# EAGLE board Thetis_RevF6_PCB (EAGLE 9.7.0)
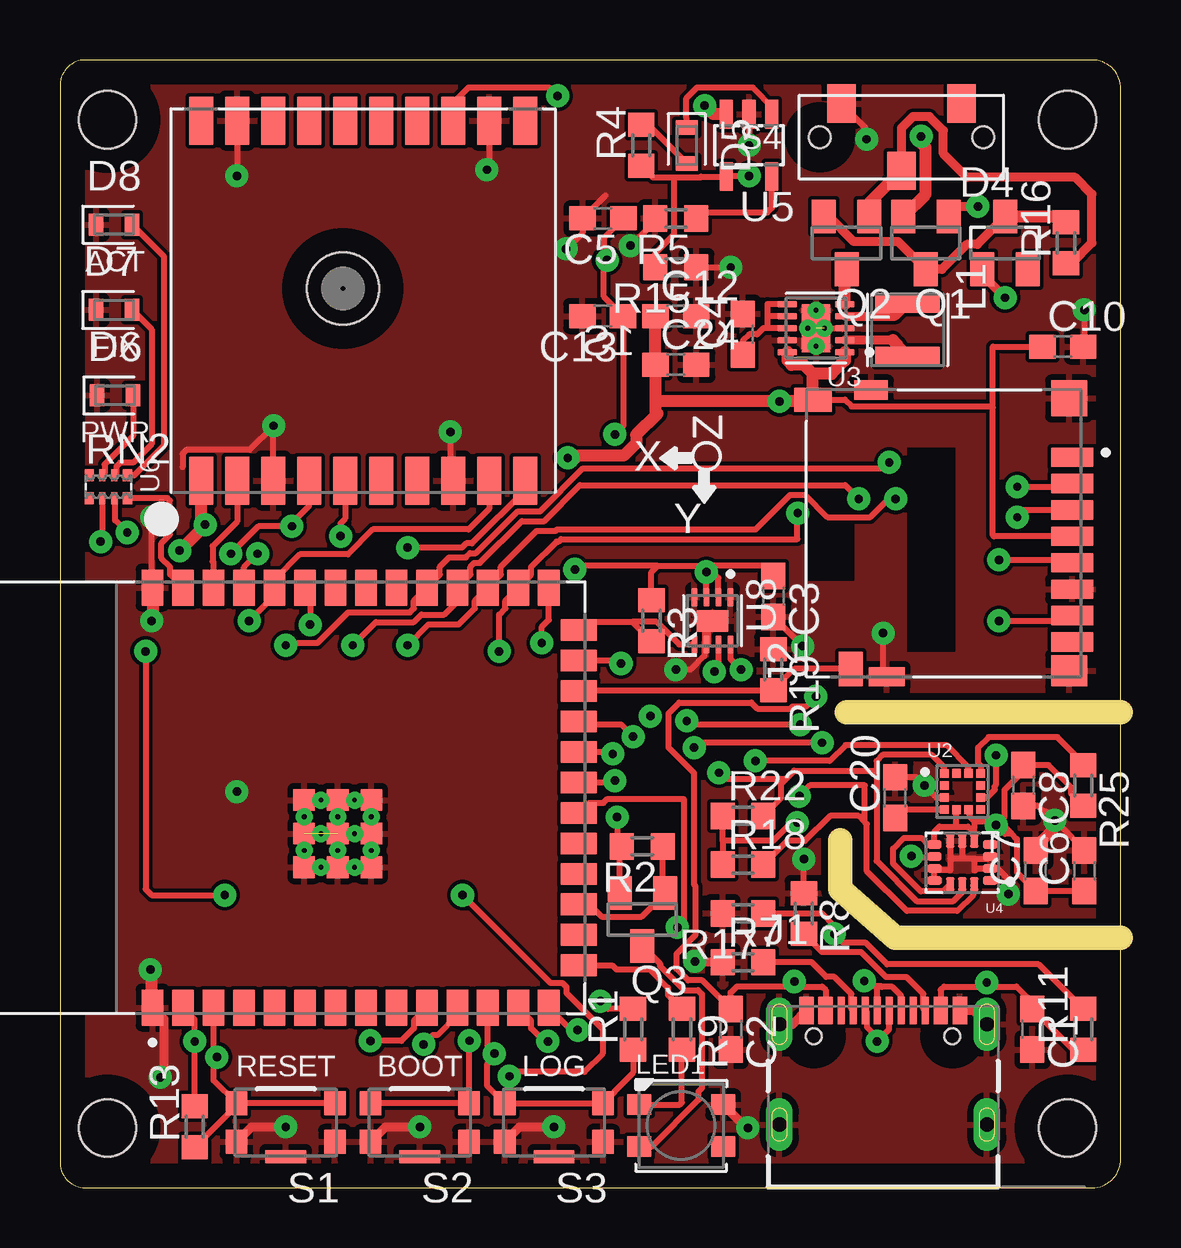
[diagram p0: board, top side]
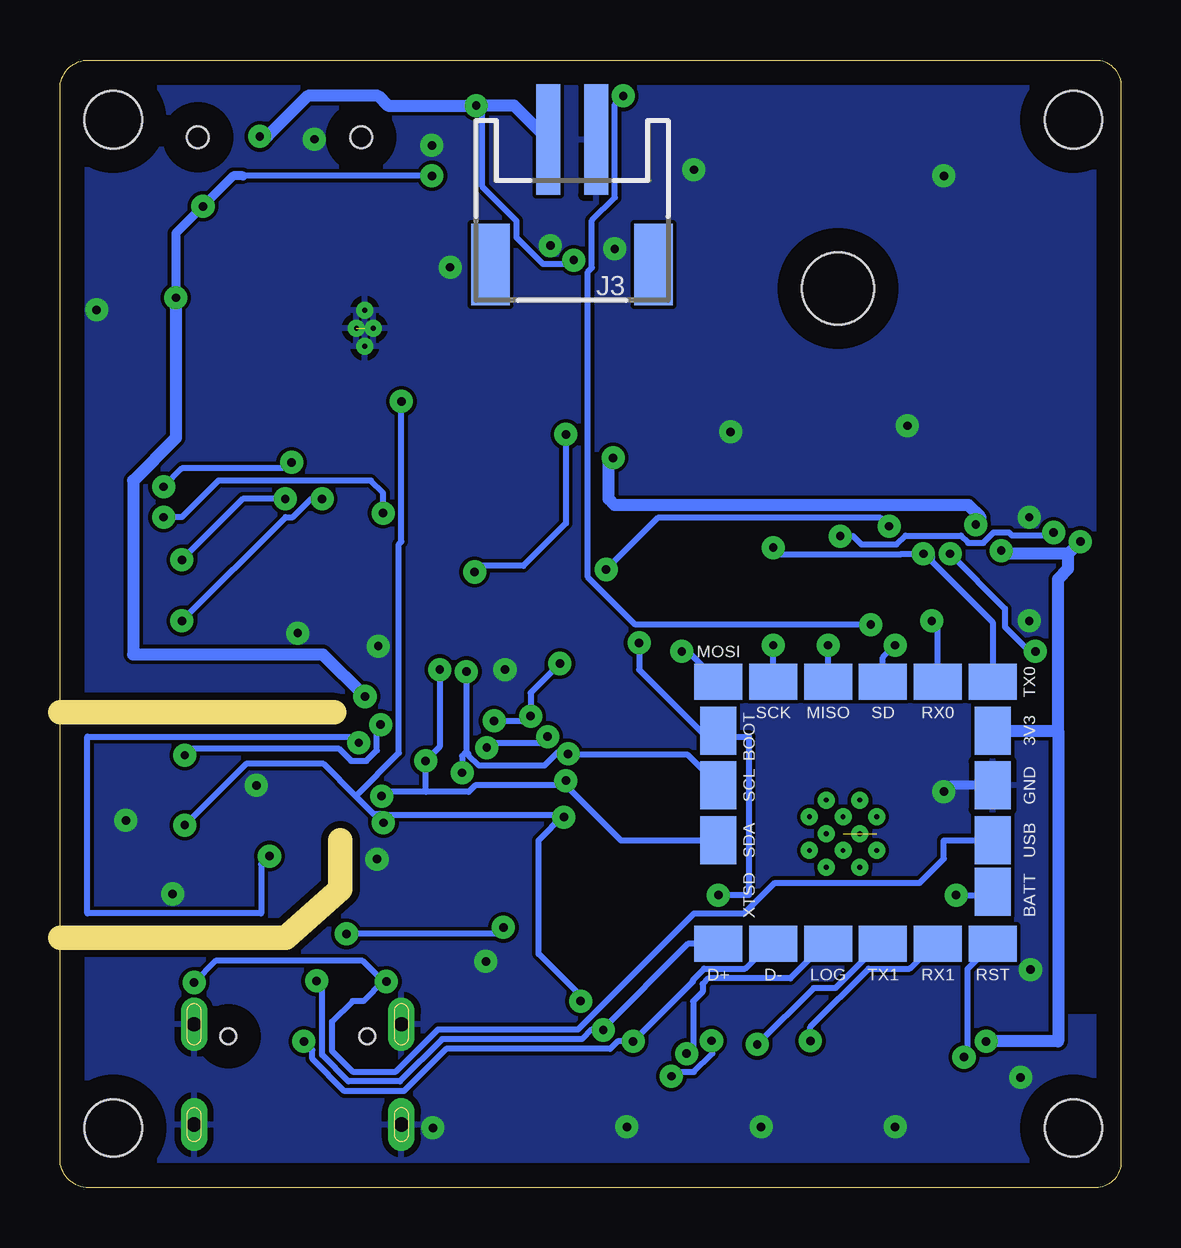
[diagram p1: board, bottom side, seen from below]

Size 44.2 x 46.99 mm. Coordinates in mm from the lower left corner, seen from the top.
Outline: 44.2,1.19 44.2,45.8 arc90 43.01,46.99 0.95,46.99 arc90 0.01,45.8 0.01,1.19 arc90 0.95,0 43.01,0 arc90 44.2,1.19
Copper layers (1*16): Top 0.035mm / dielectric 1.5mm / Bottom 0.035mm
Design rules "default *": minimum track width 6mil, minimum drill 0.3mm, track to track 6mil, track to pad 6mil, pad to pad 6mil, via to via 6mil, smd to smd 6mil, copper to edge 40mil, drill to drill 6mil, minimum pad ring 10mil, minimum via ring 12mil, stop-mask expansion 4mil, vias tented up to drill 0mil, thermal gap 10mil
Net classes: 0 default: width 0.178 mm; 1 highpower: width 0.305 mm, drill 0.483 mm; 2 lowpower: width 0.305 mm, drill 0.483 mm
Holes 2.39 mm at 1.98,2.49 1.98,44.5 41.98,44.5 41.98,2.49
tKeepout: area -0.4,42.1 to 4.4,46.9; area 39.6,42.1 to 44.4,46.9; area 39.6,0.1 to 44.4,4.9; area -0.4,0.1 to 4.4,4.9; 4 lines
bKeepout: area 39.6,42.1 to 44.4,46.9; area -0.4,42.1 to 4.4,46.9; area 39.6,0.1 to 44.4,4.9; area -0.4,0.1 to 4.4,4.9; 4 lines
tRestrict: 4 lines
bRestrict: 4 lines
Milling: 4 lines

## Footprints (pad centres in the part's own frame; a part is rotated, then mirrored left to right if it is on the bottom)
C0603 = smd 1.1 x 1: 1 -0.85,0; 2 0.85,0
SOT23 = smd 1 x 1.4: 1 -0.95,-1.1; 2 0.95,-1.1; 3 0,1.1
LEDC1608X65N = smd 0.612 x 0.912: A 0.75,0; C -0.75,0
LEDC1608X35N = smd 0.612 x 0.912: A 0.75,0; C -0.75,0
GCT_USB4105-GF-A = smd 0.6 x 1.15: A1_B12 -3.2,4.755; A4_B9 -2.4,4.755; B1_A12 3.2,4.755; B4_A9 2.4,4.755 | smd 0.3 x 1.15: A5 -1.25,4.755; A6 -0.25,4.755; A7 0.25,4.755; A8 1.25,4.755; B5 1.75,4.755; B6 0.75,4.755; B7 -0.75,4.755; B8 -1.75,4.755 | drill 0.6 pad 1.05 long: S1 -4.32,4.18; S4 4.32,4.18 | drill 0.6 pad 1 long: S2 -4.32,0; S3 4.32,0 | hole 0.65: 2.89,3.68; -2.89,3.68
HRS_DM3D-SF = smd 0.8 x 1.75: 1 3.2,0; 2 2.1,0; 3 1,0; 4 -0.1,0; 5 -1.2,0; 6 -2.3,0; 7 -3.4,0; 8 -4.5,0 | smd 1.3 x 1.5: S1 -5.7,0.125 | smd 1.5 x 1.5: S2 5.65,0.125 | smd 0.8 x 1.5: S3 -5.95,7.725 | smd 0.8 x 1.4: S4 6,8.375 | smd 1 x 1.55: SW-A 5.6,10.8 | smd 1.45 x 1: SW-B -5.625,9.225
JSTPH2 = smd 1 x 4.6: 1 -1,-3.7; 2 1,-3.7 | smd 1.6 x 3.4: NC1 -3.4,1.5; NC2 3.4,1.5
IND_LQH3NPN1R5MJRL = smd 0.8 x 2.7: 1 -1.1,0; 2 1.1,0
LED3535 = smd 1 x 0.85: 1 -1.75,0.875; 2 -1.75,-0.875; 3 1.75,-0.875; 4 1.75,0.875
R0603 = smd 1 x 1.1: 1 -0.85,0; 2 0.85,0
EXBN8V = smd 0.38 x 0.5: 1 -0.8,-0.475; 4 0.8,-0.475; 5 0.8,0.475; 8 -0.8,0.475 | smd 0.25 x 0.5: 2 -0.25,-0.475; 3 0.25,-0.475; 6 0.25,0.475; 7 -0.25,0.475
SW_KMR221GLFS = smd 0.9 x 1: 1 -2.05,0.8; 2 -2.05,-0.8; 3 2.05,-0.8; 4 2.05,0.8 | smd 1.7 x 0.55: 5 0,1.425
CL-SB-12A = smd 1.2 x 1.6: 1 -2.5,-1.4; 2 0,1.4; 3 2.5,-1.4 | hole 0.9: -3.4,0; 3.4,0
PAD-1.5X2.0 = smd 1.5 x 2: P$1 0,0
XCVR_ESP32-S3-WROOM-1-N16R2 = smd 1.5 x 0.9: 1 -8.75,5.26; 2 -8.75,3.99; 3 -8.75,2.72; 4 -8.75,1.45; 5 -8.75,0.18; 6 -8.75,-1.09; 7 -8.75,-2.36; 8 -8.75,-3.63; 9 -8.75,-4.9; 10 -8.75,-6.17; 11 -8.75,-7.44; 12 -8.75,-8.71; 13 -8.75,-9.98; 14 -8.75,-11.25; 27 8.75,-11.25; 28 8.75,-9.98; 29 8.75,-8.71; 30 8.75,-7.44; 31 8.75,-6.17; 32 8.75,-4.9; 33 8.75,-3.63; 34 8.75,-2.36; 35 8.75,-1.09; 36 8.75,0.18; 37 8.75,1.45; 38 8.75,2.72; 39 8.75,3.99; 40 8.75,5.26 | smd 0.9 x 1.5: 15 -6.985,-12.5; 16 -5.715,-12.5; 17 -4.445,-12.5; 18 -3.175,-12.5; 19 -1.905,-12.5; 20 -0.635,-12.5; 21 0.635,-12.5; 22 1.905,-12.5; 23 3.175,-12.5; 24 4.445,-12.5; 25 5.715,-12.5; 26 6.985,-12.5 | smd 0.9 x 0.9: 41_1 -1.5,-2.46; 41_2 -2.9,-2.46; 41_3 -0.1,-2.46; 41_4 -2.9,-3.86; 41_5 -1.5,-3.86; 41_6 -0.1,-3.86; 41_7 -2.9,-1.06; 41_8 -1.5,-1.06; 41_9 -0.1,-1.06 | drill 0.2 pad 0.4: 41_10 -1.5,-1.76; 41_11 -2.9,-1.76; 41_12 -0.1,-1.76; 41_13 -2.9,-3.16; 41_14 -1.5,-3.16; 41_15 -0.1,-3.16; 41_16 -2.2,-1.06; 41_17 -0.8,-1.06; 41_18 -2.2,-2.46; 41_19 -0.8,-2.46; 41_20 -2.2,-3.86; 41_21 -0.8,-3.86
XDCR_LIS3MDLTR = smd 0.375 x 0.35: 1 -0.762,0.75; 2 -0.762,0.25; 3 -0.762,-0.25; 4 -0.762,-0.75; 7 0.762,-0.75; 8 0.762,-0.25; 9 0.762,0.25; 10 0.762,0.75 | smd 0.35 x 0.375: 5 -0.25,-0.762; 6 0.25,-0.762; 11 0.25,0.762; 12 -0.25,0.762
SON50P250X250X80-11N = smd 0.81 x 0.27: 1 -1.2,1; 2 -1.2,0.5; 3 -1.2,0; 4 -1.2,-0.5; 5 -1.2,-1; 6 1.2,-1; 7 1.2,-0.5; 8 1.2,0; 9 1.2,0.5; 10 1.2,1 | smd 1.2 x 2: 11 0,0 | drill 0.2 pad 0.3: 12 0.35,0; 13 -0.35,0; 14 0,0.75; 15 0,-0.75
PQFN50P300X250X97-14N = smd 0.61 x 0.35: 1 -1.16,0.75; 2 -1.16,0.25; 3 -1.16,-0.25; 4 -1.16,-0.75; 8 1.16,-0.75; 9 1.16,-0.25; 10 1.16,0.25; 11 1.16,0.75 | smd 0.35 x 0.61: 5 -0.5,-0.91; 6 0,-0.91; 7 0.5,-0.91; 12 0.5,0.91; 13 0,0.91; 14 -0.5,0.91
SOT23-5L = smd 0.55 x 1.2: 1 -0.95,-1.3; 2 0,-1.3; 3 0.95,-1.3; 4 0.95,1.3; 5 -0.95,1.3
FGPMMOPA6H = smd 2 x 1: P$1 -7.5,6.75; P$2 -7.5,5.25; P$3 -7.5,3.75; P$4 -7.5,2.25; P$5 -7.5,0.75; P$6 -7.5,-0.75; P$7 -7.5,-2.25; P$8 -7.5,-3.75; P$9 -7.5,-5.25; P$10 -7.5,-6.75; P$11 7.5,-6.75; P$12 7.5,-5.25; P$13 7.5,-3.75; P$14 7.5,-2.25; P$15 7.5,-0.75; P$16 7.5,0.75; P$17 7.5,2.25; P$18 7.5,3.75; P$19 7.5,5.25; P$20 7.5,6.75 | hole 3: 0.5,0.85
SON50P200X200X80-9N = smd 0.76 x 0.27: 1 -0.985,0.75; 2 -0.985,0.25; 3 -0.985,-0.25; 4 -0.985,-0.75; 5 0.985,-0.75; 6 0.985,-0.25; 7 0.985,0.25; 8 0.985,0.75 | smd 0.9 x 1.3: 9 0,0

## Placement (x,y rotation side)
C1  1 uF  [C0603]  40.52,6.6 270 top
C2  1 uF  [C0603]  27.95,6.6 270 top
C3  0.1 uF  [C0603]  29.73,24.64 270 top
C4  0.1 uF  [C0603]  28.46,35.56 90 top
C5  10 uF  [C0603]  22.62,40.39 180 top
C6  0.1 uF  [C0603]  42.69,13.21 90 top
C7  0.1 uF  [C0603]  40.65,13.21 90 top
C8  1 uF  [C0603]  40.14,16.76 270 top
C10  1 uF  [C0603]  41.79,35.05 0 top
C12  1 uF  [C0603]  25.66,36.32 0 top
C13  1 uF  [C0603]  22.61,36.32 180 top
C20  0.1 uF  [C0603]  34.81,16.26 90 top
C24  0.1 uF  [C0603]  25.66,34.29 0 top
D4  BAT400  [SOT23]  39.38,39.37 0 top
D5  ORG  [LEDC1608X65N]  26.11,43.43 270 top
D6  RED  [LEDC1608X65N]  2.29,33.02 0 top
D7  RED  [LEDC1608X35N]  2.25,36.58 0 top
D8  BLU  [LEDC1608X65N]  2.25,40.13 0 top
J1  USB4105-GF-A  [GCT_USB4105-GF-A]  34.3,2.63 0 top
J2  DM3D-SF  [HRS_DM3D-SF]  42.17,27.24 90 top
J3  [JSTPH2]  22.87,39.97 180 bottom
L1  LQH3NPN1R5MJRL  [IND_LQH3NPN1R5MJRL]  35.31,35.75 270 top
LED1  WS2812B3535  [LED3535]  25.88,2.59 0 top
Q1  AOSS21311C  [SOT23]  36.08,39.37 180 top
Q2  AOSS21311C  [SOT23]  32.77,39.37 180 top
Q3  AOSS21311C  [SOT23]  24.26,11.18 180 top
R1  10k  [R0603]  23.88,6.6 90 top
R2  1k  [R0603]  24.26,14.22 180 top
R3  10k  [R0603]  24.65,23.62 270 top
R4  1k  [R0603]  24.22,43.43 90 top
R5  2k  [R0603]  25.66,40.39 180 top
R7  5k1  [R0603]  28.46,9.4 0 top
R8  5k1  [R0603]  31,11.43 270 top
R9  1k  [R0603]  25.92,6.6 270 top
R11  100k  [R0603]  42.64,6.6 90 top
R13  10k  [R0603]  5.61,2.54 90 top
R15  100k  [R0603]  25.66,38.35 180 top
R16  100k  [R0603]  41.92,39.37 90 top
R17  200k  [R0603]  28.46,11.43 180 top
R18  2.7k  [R0603]  28.46,13.46 0 top
R19  10k  [R0603]  29.73,21.59 270 top
R22  2.7k  [R0603]  28.46,15.49 0 top
R25  10k  [R0603]  42.64,16.76 270 top
RN2  1k  [EXBN8V]  2.01,29.21 0 top
S1  KMR221GLFS  [SW_KMR221GLFS]  9.41,2.72 180 top
S2  KMR221GLFS  [SW_KMR221GLFS]  14.99,2.72 180 top
S3  KMR221GLFS  [SW_KMR221GLFS]  20.58,2.72 180 top
S4  CL-SB-12X  [CL-SB-12A]  35.06,43.77 180 top
TP1  [PAD-1.5X2.0]  9.91,10.16 270 bottom
TP2  [PAD-1.5X2.0]  7.63,10.16 270 bottom
TP3  [PAD-1.5X2.0]  5.34,10.16 270 bottom
TP4  [PAD-1.5X2.0]  16.77,19.05 180 bottom
TP5  [PAD-1.5X2.0]  14.49,10.16 270 bottom
TP6  [PAD-1.5X2.0]  16.77,10.16 270 bottom
TP7  [PAD-1.5X2.0]  16.77,14.48 0 bottom
TP8  [PAD-1.5X2.0]  16.77,16.76 0 bottom
TP9  [PAD-1.5X2.0]  9.91,21.08 270 bottom
TP10  [PAD-1.5X2.0]  14.49,21.08 90 bottom
TP11  [PAD-1.5X2.0]  12.2,21.08 270 bottom
TP12  [PAD-1.5X2.0]  16.77,21.08 270 bottom
TP13  [PAD-1.5X2.0]  12.2,10.16 270 bottom
TP14  [PAD-1.5X2.0]  5.34,12.33 0 bottom
TP15  [PAD-1.5X2.0]  5.34,16.76 0 bottom
TP16  [PAD-1.5X2.0]  5.34,19.05 0 bottom
TP17  [PAD-1.5X2.0]  5.34,14.48 0 bottom
TP18  [PAD-1.5X2.0]  7.63,21.08 270 bottom
TP19  [PAD-1.5X2.0]  5.34,21.08 270 bottom
U1  ESP32-S3-WROOM-1-N16R2  [XCVR_ESP32-S3-WROOM-1-N16R2]  9.11,16.26 90 top
U2  LIS3MDLTR  [XDCR_LIS3MDLTR]  37.6,16.51 0 top
U3  TPS63030DSKR  [SON50P250X250X80-11N]  31.5,35.81 180 top
U4  LSM6DSO32TR  [PQFN50P300X250X97-14N]  37.59,13.55 180 top
U5  MCP73831/OT  [SOT23-5L]  28.71,43.43 180 top
U6  [FGPMMOPA6H]  12.63,36.97 90 top
U8  MAX17048G+T10  [SON50P200X200X80-9N]  27.19,23.62 270 top

## Library data of the parts
C1-C8 C10 C12 C13 C20 C24 = rcl; SPICEPREFIX: C
D4 = diode
D5 D6 D8 = LED; CATEGORY: LED; COLOR: GREEN; DESCRIPTION: CHIP LED ROUND; SUB-CATEGORY: CHIP; TYPE: ROUND_TOP
D7 = LED; CATEGORY: LED; COLOR: YELLOW; DESCRIPTION: CHIP LED FLAT; SUB-CATEGORY: CHIP; TYPE: FLAT_TOP
J1 = USB4105-GF-A; AVAILABILITY: In Stock; DESCRIPTION: USB-C (USB TYPE-C) USB 2.0 Receptacle Connector 24 (16+8 Dummy) Position Surface Mount, Right Angle; Through Hole; MF: GCT; MP: USB4105-GF-A; PACKAGE: None; PRICE: None; PURCHASE-URL: https://pricing.snapeda.com/search/part/USB4105-GF-A/?ref=eda
J2 = UTL-Lib; MANUFACTURER: Hirose; MAXIMUM_PACKAGE_HEIGHT: 1.55mm; PARTREV: 2017.1; STANDARD: Manufacturer Recommendations
J3 U8 = UTL-Lib
L1 = UTL-Lib; CHECK_PRICES: https://www.snapeda.com/parts/LQH3NPN1R5MJRL/Murata+Electronics+North+America/view-part/?ref=eda; DESCRIPTION: 1.5 µH Shielded Drum Core, Wirewound Inductor 1.1 A 58.8mOhm Max 1212 (3030 Metric); DIGIKEY_PART_NUMBER: 490-9576-2-ND; MF: Murata Electronics; MP: LQH3NPN1R5MJRL; PACKAGE: NONSTANDARD; PURCHASE-URL: https://www.snapeda.com/api/url_track_click_mouser/?unipart_id=1017998&manufacturer=Murata Electronics&part_name=LQH3NPN1R5MJRL&search_term=None; SNAPEDA_LINK: https://www.snapeda.com/parts/LQH3NPN1R5MJRL/Murata+Electronics+North+America/view-part/?ref=snap
LED1 = adafruit
Q1-Q3 = Transistor; CATEGORY: Transistor; DESCRIPTION: MOSFET P-CH 50V 130MA SOT-23; DRAIN_CURRENT: 130mA; MANUFACTURER: ON Semiconductor; MPN: BSS84; OPERATING_TEMP: -55°C ~ 150°C; PART_STATUS: Active; ROHS_COMPLIANT: Yes; SUB-CATEGORY: MOSFET; THERMALLOSS: 360mW; TYPE: P-Channel
R1-R5 R7-R9 R11 R13 R15-R19 R22 R25 = rcl; SPICEPREFIX: R
RN2 = resistor-dil-Poseidon-Edit; OC_FARNELL: unknown; OC_NEWARK: unknown
S1-S3 = KMR221GLFS; MANUFACTURER: CnK
S4 = switches; DIGIKEY: 563-1314-1-ND
TP1-TP19 = microbuilder
U1 = UTL-Lib; AVAILABILITY: In Stock; CHECK_PRICES: https://www.snapeda.com/parts/ESP32-S3-WROOM-1-N16R2/Espressif+Systems/view-part/?ref=eda; DESCRIPTION: Bluetooth, WiFi 802.11b/g/n, Bluetooth v5.0 Transceiver Module 2.4GHz PCB Trace Surface Mount; MF: Espressif Systems; MP: ESP32-S3-WROOM-1-N16R2; PACKAGE: None; PRICE: None; PURCHASE-URL: https://www.snapeda.com/api/url_track_click_mouser/?unipart_id=11099128&manufacturer=Espressif Systems&part_name=ESP32-S3-WROOM-1-N16R2&search_term=esp32-s3-wroom-1; SNAPEDA_LINK: https://www.snapeda.com/parts/ESP32-S3-WROOM-1-N16R2/Espressif+Systems/view-part/?ref=snap
U2 = UTL-Lib; AVAILABILITY: Unavailable; DESCRIPTION: LIS3MDL Series 3 Axis ±2/±8/±12/±16 g 3.6V High Performance Magnetometer LGA-12; MAXIMUM_PACKAGE_HEIGHT: 1mm; MF: STMicroelectronics; MP: LIS3MDLTR; PACKAGE: VFLGA-12 STMicroelectronics; PARTREV: 6; PRICE: None; STANDARD: Manufacturer Recommendation
U3 = UTL-Lib; AVAILABILITY: In Stock; CHECK_PRICES: https://www.snapeda.com/parts/TPS63030DSKR/Texas+Instruments/view-part/?ref=eda; DESCRIPTION: High Efficient Single Inductor Buck-Boost Converter with 1-A Switches; MF: Texas Instruments; MP: TPS63030DSKR; PACKAGE: WSON-10 Texas Instruments; PRICE: None; PURCHASE-URL: https://www.snapeda.com/api/url_track_click_mouser/?unipart_id=1101370&manufacturer=Texas Instruments&part_name=TPS63030DSKR&search_term=tps63030dskr; SNAPEDA_LINK: https://www.snapeda.com/parts/TPS63030DSKR/Texas+Instruments/view-part/?ref=snap
U4 = UTL-Lib; MANUFACTURER: TDK Corporation; PARTREV: 0.4; STANDARD: IPC 7351B
U5 U6 = adafruit - EVE Edit

## Nets
3.3V: C6.1 C7.1 C8.1 C10.1 C12.1 C24.1 J2.4 J2.SW-A Q3.2 R1.2 R2.2 R13.2 R18.1 R22.1 R25.2 RN2.2 TP16.P$1 U1.2 U2.5 U2.6 U3.1 U3.10 U4.5 U4.8 U4.12 U6.P$1
!BATT_ALERT: R3.2 U1.26 U8.5
!GPS_RST: U1.38 U6.P$2
!LOG_EN: R1.1 S3.2 S3.3 TP13.P$1 U1.12
!NEO_EN: Q3.1 R2.1 U1.17
!RST: R13.1 S1.2 S1.3 TP3.P$1 U1.3
ACT_LED: RN2.4 U1.39
BOOT: S2.2 S2.3 TP4.P$1 U1.27
CC1: J1.A5 R7.2
CC2: J1.B5 R8.2
ESP_RX0: TP18.P$1 U1.36 U6.P$9
ESP_RX1: TP2.P$1 U1.10
ESP_TX0: TP19.P$1 U1.37 U6.P$10
ESP_TX1: TP1.P$1 U1.11
GND: C1.2 C2.2 C3.2 C4.2 C5.2 C6.2 C7.2 C8.2 C10.2 C12.2 C13.2 C20.2 C24.2 D6.C D7.C D8.C J1.A1_B12 J1.B1_A12 J1.S1 J1.S2 J1.S3 J1.S4 J2.6 J2.S1 J2.S2 J2.S3 J2.S4 J3.1 LED1.4 R5.2 R7.1 R8.1 R15.1 R17.2 R19.1 S1.1 S1.4 S1.5 S2.1 S2.4 S2.5 S3.1 S3.4 S3.5 S4.3 TP15.P$1 U1.1 U1.40 U1.41_1 U1.41_2 U1.41_3 U1.41_4 U1.41_5 U1.41_6 U1.41_7 U1.41_8 U1.41_9 U2.3 U3.3 U3.9 U3.11 U3.12 U3.13 U3.14 U3.15 U4.2 U4.3 U4.6 U4.7 U4.10 U4.11 U5.2 U6.P$3 U6.P$8 U6.P$12 U6.P$19 U8.1 U8.4 U8.6 U8.9
GPS_PPS: U1.35 U6.P$13
IMU_DRDY: U1.23 U4.9
MAG_DRDY: U1.25 U2.8
MISO: J2.7 TP11.P$1 U1.30
MOSI: J2.3 TP12.P$1 U1.28
N$1: Q2.1 R16.1 S4.2
N$2: D7.A RN2.6
N$3: D8.A RN2.5
N$4: Q2.3 U3.5
N$5: LED1.2 Q3.3
N$6: D6.A RN2.7
N$7: C20.1 U2.4
N$8: LED1.1 R9.2
N$9: RN2.3 U6.P$5
N$10: L1.1 U3.4
N$12: L1.2 U3.2
N$13: D4.3 Q1.3 Q2.2 R16.2
N$15: R25.1 U2.10
N$16: C4.1 U3.6 U3.7 U3.8
N$20: D5.A R4.2
N$21: D5.C U5.1
N$22: R5.1 U5.5
NEO_DATA: R9.1 U1.15
SCK: J2.5 TP10.P$1 U1.29
SCL: R22.2 TP8.P$1 U1.22 U2.1 U4.13 U8.7
SD_CD: J2.SW-B R19.2 U1.24
SD_CS: J2.2 TP9.P$1 U1.31
SDA: R18.2 TP7.P$1 U1.21 U2.11 U4.14 U8.8
USB_DN: J1.A7 J1.B7 TP5.P$1 U1.13
USB_DP: J1.A6 J1.B6 TP6.P$1 U1.14
USB_MON: R11.2 R17.1 U1.20
V_BATT: C3.1 C5.1 C13.1 J3.2 Q1.2 R3.1 TP14.P$1 U5.3 U6.P$4 U8.2 U8.3
V_USB: C1.1 C2.1 D4.1 J1.A4_B9 J1.B4_A9 Q1.1 R4.1 R11.1 R15.2 TP17.P$1 U5.4

## Tracks (layer width: path | path; a pad name or v marks a point on that pad's centre or on a via)
3.3V  (via drill 0.35)
  Top 0.254: U2.6 37.9,15.7 37.9,15.47 38.09,15.27 | 38.09,15.27 38.09,14.99 | 38.09,14.99 37.89,14.99 37.83,15.04 37.35,15.04 | 37.35,15.04 36.64,15.04 36.43,14.84 U4.8 36.18,14.3 35.9,14.58 35.16,14.58 34.71,14.13 34.71,13.5 35.87,12.35 36.8,12.35 37.02,12.56 U4.12 | U2.5 37.35,15.05 37.35,15.04 | 38.09,15.27 39.12,15.27 39.65,14.75 | C6.1 C7.1 39.87,13.14 39.87,14.53 39.65,14.75 | R13.2 v5.61,6.1 5.61,7.02 U1.2 | Q3.2 23.31,14.12 R2.2 23.21,14.43 v23.21,15.44 | 27.61,14.48 R18.1 | 27.61,14.48 R22.1 | RN2.2 1.76,27 v1.69,26.92 | R1.2 22.84,7.45 v22.52,7.78 | U4.5 38.09,14.99 | 27.61,14.48 29.73,14.48 30.47,15.21 v30.73,15.21 | 39.65,14.75 39.37,14.75 v39.01,15.11 39.36,15.46 39.36,16.58 40.14,17.36 C8.1 41.19,17.61 42.13,16.68 42.13,16.43 R25.2 | J2.4 38.91,27.14 38.87,27.18 38.87,32.51 | 38.87,32.51 38.87,35.05 C10.1 | J2.SW-A 32.7,32.84 32.98,32.56 38.82,32.56 38.87,32.51
  Top 0.508: C12.1 C24.1 24.81,32.77 | 24.81,32.77 24.81,32.35 24.9,32.26 24.01,31.37 24.01,31.02 23.49,30.5 21.57,30.5 21.47,30.41 v21.16,30.41 | U6.P$1 5.89,27.79 v6.05,27.63 6.05,27.61 v4.98,26.55 | 31.37,33.91 J2.SW-A 31.3,32.77 v29.98,32.77 24.81,32.77 | 31.37,33.91 31,34.29 30.49,34.29 30.3,34.47 U3.10 | U3.1 32.7,34.47 32.14,33.91 31.37,33.91
  Bottom 0.254: 23.21,15.53 24.26,14.48 24.26,9.75 22.52,8 v22.52,7.78 | 23.21,15.53 30.67,15.53 30.73,15.48 | 31.88,16.32 33.22,17.66 36.45,17.66 v39.01,15.11 | v30.73,15.21 30.73,15.48 | 30.73,15.48 30.81,15.56 31.12,15.56 31.88,16.32 | 31.88,16.32 30.08,18.12 30.08,26.82 29.98,26.92 v29.98,32.77 | 23.21,15.53 v23.21,15.44 | 5.84,27.93 5.84,27.83 v6.05,27.63
  Bottom 0.508: 5.84,27.93 6.36,28.45 21.09,28.45 21.34,28.7 21.34,30.23 v21.16,30.41 | 2.2,26.42 v1.69,26.92 | TP16.P$1 2.62,19.05 | 2.62,19.05 2.62,25.36 2.2,25.78 2.2,26.42 | v5.61,6.1 2.62,6.1 2.62,19.05 | 2.2,26.42 4.85,26.42 v4.98,26.55
!BATT_ALERT
  Top 0.254: U8.5 25.8,22.64 24.86,23.58 23.84,23.58 | 23.84,23.58 R3.2 | U1.26 21.95,23.58 23.84,23.58
!GPS_RST
  Top 0.254: U1.38 6.4,26.07 6.36,26.1 6.36,26.73 7.39,27.75 U6.P$2
!LOG_EN  (via drill 0.35)
  Top 0.254: 17.83,5.84 U1.12 | 17.83,5.84 17.83,5.17 17.79,5.14 17.79,4.26 S3.3 S3.2 23.1,3.98 23.1,4 23.88,4.79 R1.1 | 17.83,5.84 17.85,5.84 v18.1,5.59
  Bottom 0.254: TP13.P$1 12.34,10.16 13.78,8.72 17.19,8.72 17.43,8.49 17.43,8.16 17.83,7.77 17.83,5.86 v18.1,5.59
!NEO_EN
  Top 0.254: U1.17 22.06,11.81 22.57,11.3 24.24,11.3 25.11,12.18 | 25.11,12.18 Q3.1 | 25.11,12.18 R2.1
!RST  (via drill 0.35)
  Top 0.254: S1.2 S1.3 | R13.1 7.36,3.43 S1.3 | U1.3 6.4,5.59 | 6.4,5.59 6.4,4.48 S1.3 | 6.4,5.59 v6.54,5.45
  Bottom 0.254: TP3.P$1 6.4,9.11 6.4,5.59 v6.54,5.45
ACT_LED
  Top 0.254: U1.39 4.58,25.55 4.58,25.87 4.22,26.23 4.22,26.86 4.58,27.21 4.58,28.63 4.47,28.73 RN2.4
BOOT  (via drill 0.35)
  Top 0.254: S2.3 S2.2 v17.04,6.11 v17.06,6.12 | U1.27 20.37,23.66 20.07,23.37 v20.07,22.7 | v16.77,12.19 20.43,8.54 20.93,8.54 21.09,8.37 21.09,8.12 22.61,6.6 22.61,5.59 21.85,4.83 18.9,4.83 v18.73,4.65
  Bottom 0.254: v20.07,22.7 20.07,21.59 17.38,18.9 TP4.P$1 16.52,18.8 15.5,18.8 15.5,12.19 v16.77,12.19 | v18.73,4.65 18.55,4.83 17.79,4.83 17.03,5.59 17.03,6.1 v17.05,6.12 v17.06,6.12
CC1
  Top 0.254: J1.A5 32.98,7.46 32.98,8.08 32.27,8.79 31.93,8.79 31.32,9.4 R7.2
CC2
  Top 0.254: R8.2 31.76,9.82 33.38,9.82 34.42,8.78 35.28,8.78 35.98,8.08 35.98,7.46 J1.B5
ESP_RX0  (via drill 0.35)
  Top 0.254: U6.P$9 17.89,28.29 17.02,27.43 13.04,27.43 12.01,26.4 10,26.4 8.97,25.36 8.97,25.04 U1.36 8.94,24.68 v7.88,23.62
  Bottom 0.254: TP18.P$1 7.63,23.37 v7.88,23.62
ESP_RX1  (via drill 0.35)
  Top 0.254: U1.10 14.74,6.96 14.74,6.64 14.22,6.12 v12.94,6.12
  Bottom 0.254: TP2.P$1 7.77,10.16 8.8,9.13 10.51,9.13 12.94,6.7 v12.94,6.12
ESP_TX0  (via drill 0.35)
  Top 0.254: U6.P$10 19.43,29.43 19.43,29.11 17.16,26.85 16.92,26.85 16.74,26.67 v14.49,26.67 | U1.37 7.67,25.85 v8.23,26.42
  Bottom 0.254: 7.88,26.42 9.16,26.42 9.18,26.4 14.21,26.4 v14.49,26.67 | v8.23,26.42 7.88,26.42 | 7.88,26.42 7.88,26.41 7.88,26.1 5.34,23.56 TP19.P$1
ESP_TX1  (via drill 0.35)
  Top 0.254: U1.11 16.56,7.18 15.73,6.36 15.53,6.36 v15.15,5.97
  Bottom 0.254: TP1.P$1 10.05,10.16 11.9,8.32 12.81,8.32 v15.15,5.97
GND  (via drill 0.35)  (2 unrouted)
  Top 0.254: C6.2 41.67,15.08 C7.2 40.65,14.35 41.46,15.15 v41.46,15.3 41.1,15.66 41,15.66 40.75,15.91 C8.2 | U4.7 37.09,13.72 | 37.09,13.72 37.09,13.22 36.51,13.22 U4.10 U4.11 | U4.6 37.59,13.72 37.6,13.72 | 37.6,13.72 37.09,13.72 | U4.3 38.67,13.72 38.11,13.72 | 38.11,13.72 37.6,13.72 | 38.11,13.72 38.11,13.22 38.12,13.22 38.2,13.3 U4.2 39.08,13.3 39.52,12.86 v39.52,12.24 | C20.2 35.68,17.11 v36.02,16.76 36.52,16.26 U2.3 | R5.2 24.81,40.28 23.78,39.25 v23.77,39.25 | v21.09,39.12 21.77,39.8 C5.2 22.74,41.35 | R15.1 v27.95,38.35 | U5.2 v28.71,43.43 | S4.3 33.54,44.2 33.54,43.76 v33.61,43.69 | U3.13 U3.3 | U6.P$3 8.89,31.74 v8.9,31.75 7.89,30.75 5.27,30.75 5.11,30.58 5.11,30.03 | U6.P$19 7.39,42.18 v7.37,42.16 | U6.P$12 17.89,42.52 v17.79,42.42 | U6.P$8 16.26,29.59 v16.26,31.5 | U1.40 3.82,25.04 v3.82,27.94 | U8.6 26.85,22.55 26.85,22.16 26.28,21.59 v25.66,21.59 | R8.1 v31,13.69 | C3.2 v30.94,22.57 | v42.68,36.58 42.68,35.09 C10.2 | J2.S3 34.3,21.44 v34.3,23.11
  Top 0.381: S1.4 7.98,2.54 v9.41,2.54 | S2.4 13.57,2.54 v14.99,2.54 | S3.4 19.16,2.54 v20.58,2.54 | U1.1 4.33,7.03 4.33,4.75 v4.18,4.6 | U8.6 26.94,23.37 U8.9 | J1.A1_B12 30.52,6.81 J1.S1 | U1.41_8 | J1.B1_A12 38.04,7.39 J1.S4 | R7.1 26.49,9.4 v26.46,9.43 | v28.67,2.5 28.6,2.5 LED1.4
  Top 0.508: U1.1 3.82,7.54 3.82,9.04 v3.77,9.09 | U1.40 3.86,23.66 v3.82,23.62
  Bottom 0.381: TP15.P$1 7.12,16.76 v7.37,16.51
  pour Bottom: -1.64,-1.14 46.62,-1.14 46.62,47.88 -1.64,47.88
  pour Top: -1.64,-1.14 46.62,-1.14 46.62,47.88 -1.64,47.88
GPS_PPS  (via drill 0.35)
  Top 0.254: U6.P$13 16.39,45.21 17.03,45.85 20.38,45.85 v20.74,45.49 | U1.35 10.42,24.79 v10.42,23.46
  Bottom 0.254: v20.74,45.49 21.09,45.14 21.09,41.26 22.04,40.31 22.04,38.34 22.21,38.16 22.21,25.45 20.23,23.46 v10.42,23.46
IMU_DRDY  (via drill 0.35)
  Top 0.254: U4.9 36.39,13.75 35.65,13.75 35.59,13.82 v35.47,13.82 | v31.76,18.54 26.62,18.54 v26.42,18.34 | v23.88,18.8 23.38,19.3 21.74,19.3 U1.23
  Bottom 0.254: v31.76,18.54 32.01,18.8 43.06,18.8 43.06,11.43 35.82,11.43 35.82,13.47 v35.47,13.82 | v23.88,18.8 24.14,18.54 26.22,18.54 v26.42,18.34
MAG_DRDY  (via drill 0.35)
  Top 0.254: U2.8 38.62,16.26 38.95,16.59 38.95,16.75 39.01,16.8 v39.01,18.02 | v26.12,19.45 26.27,19.3 v30.84,19.3 | U1.25 23.25,21.97 v23.38,21.84
  Bottom 0.254: v39.01,18.02 38.95,18.02 38.68,18.29 32.58,18.29 32.07,17.78 31.44,17.78 31,18.23 31,19.15 v30.84,19.3 | v26.12,19.45 24.8,19.45 v24.6,19.66 24.6,20.62 v23.38,21.84
MISO  (via drill 0.35)
  Top 0.254: v12.2,22.61 13.16,23.57 14.75,23.57 15.05,23.88 16.01,23.88 16.56,24.42 U1.30 17.1,25.55 17.1,25.87 17.26,26.04 17.5,26.04 19.24,27.78 20.17,27.78 21.67,29.28 32.71,29.28 v33.28,28.7 | v39.12,23.62 41.95,23.62 J2.7
  Bottom 0.254: TP11.P$1 v12.2,22.61 | v39.12,23.62 34.8,27.95 34.5,27.95 33.74,28.7 v33.28,28.7
MOSI  (via drill 0.35)
  Top 0.254: v18.3,22.35 18.3,23.88 18.55,24.14 18.55,24.46 U1.28 19.64,25.55 19.64,25.87 20.69,26.93 20.78,26.93 20.88,27.03 30.72,27.03 30.72,28.1 v30.74,28.11 | v39.89,27.94 40.19,28.24 J2.3
  Bottom 0.254: TP12.P$1 18.04,22.35 v18.3,22.35 | v39.89,27.94 39.12,27.94 37.6,29.46 31.25,29.46 30.74,28.95 v30.74,28.11
N$1
  Top 0.381: S4.2 35.06,43.46 35.06,43.47 35.06,44.15 35.54,44.63 36.22,44.63 36.8,44.05 36.8,43.09 37.79,42.1 42.3,42.1 43,41.4 43,39.37 42.15,38.52 R16.1
  Top 0.508: Q2.1 33.72,41.04 S4.2
N$2
  Top 0.254: D7.A 3.82,35.76 3.82,30.99 3.04,30.21 2.51,30.21 2.34,30.05 2.34,29.77 RN2.6
N$3
  Top 0.254: D8.A 4.33,38.81 4.33,30.92 3.09,29.68 RN2.5
N$4
  Top 0.508: U3.5 32.7,38.2 Q2.3
N$5
  Top 0.254: Q3.3 25,9.34 25,9.24 26.01,8.23 26.58,8.23 26.74,8.07 26.74,4.15 26.6,4 26.6,3.66 24.65,1.72 LED1.2
N$6
  Top 0.254: RN2.7 1.86,29.78 1.86,30.14 3.04,31.32 D6.A
N$7
  Top 0.254: U2.4 35.16,15.76 C20.1
N$8
  Top 0.254: LED1.1 25.82,3.46 25.92,3.56 R9.2
N$9  (via drill 0.35)
  Top 0.254: RN2.3 2.29,28.7 2.29,27.81 v2.8,27.3 | U6.P$5 11.89,27.88 11.69,27.69 v11.69,27.16
  Bottom 0.254: v11.69,27.16 11.16,27.16 10.81,26.8 9.35,26.8 8.97,27.18 6.67,27.18 6.36,26.87 5.73,26.87 5.3,27.31 4.67,27.31 4.54,27.18 2.92,27.18 v2.8,27.3
N$10
  Top 0.381: U3.4 34.8,36.31 35.31,36.83 L1.1
N$12
  Top 0.381: U3.2 34.7,35.31 34.88,35.13
  Top 0.508: 34.7,35.31 34.88,35.13 34.88,35.08 L1.2
N$13
  Top 0.381: Q2.2 32.04,40.47 33.08,39.43 34.92,39.43 Q1.3 36.74,38.27 37.79,39.31 38.22,39.31 D4.3
  Top 0.508: D4.3 41.67,40.47 R16.2
N$15
  Top 0.254: R25.1 42.68,17.66 41.56,18.78 38.69,18.78 38.25,18.34 38.25,17.71 38.36,17.59 U2.10
N$16
  Top 0.254: U3.8 29.47,35.81 | C4.1 28.46,35.31 28.71,35.56 29.05,35.56 29.3,35.81 29.47,35.81 | U3.6 29.49,36.81 29.47,36.83 29.47,36.32 | 29.47,36.32 29.47,35.81 | U3.7 29.48,36.31 29.47,36.32
N$20
  Top 0.254: R4.2 24.51,44.28 D5.A
N$21
  Top 0.254: U5.1 29.73,44.8 29.73,44.99 28.87,45.85 26.55,45.85 26.1,45.4 26.1,44.55 26.11,44.55 D5.C
N$22
  Top 0.254: R5.1 26.77,40.64 29.47,40.64 29.66,40.83 U5.5
NEO_DATA
  Top 0.254: U1.15 23,9.27 23.18,9.1 24.57,9.1 25.33,8.34 25.33,8.04 R9.1
SCK  (via drill 0.35)
  Top 0.254: v14.49,22.61 15.35,23.47 16.61,23.47 17.28,24.14 17.28,24.46 U1.29 18.37,25.55 18.37,25.87 19.87,27.37 20.65,27.37 20.71,27.43 28.99,27.43 30.42,28.87 31.05,28.87 31.98,27.95 33.77,27.95 34.53,28.7 v34.82,28.7 | v39.12,26.16 42.05,26.16 J2.5
  Bottom 0.254: TP10.P$1 v14.49,22.61 | v39.12,26.16 36.58,28.7 v34.82,28.7
SCL  (via drill 0.35)
  Top 0.254: U2.1 36.84,17.53 36.33,18.03 34.29,18.03 34.03,17.77 34.03,17.38 | 34.03,17.38 34.03,13.62 35.7,11.94 37.22,11.94 37.59,12.32 U4.13 | U8.7 27.44,21.84 27.27,21.67 v27.27,21.51 | R22.2 30.05,16.24 30.05,16.83 30.24,17.02 | 34.03,17.38 30.59,17.38 30.24,17.02 | 30.24,17.02 27.72,17.02 v27.45,17.29 | U1.22 22.95,18.16 v23.03,18.07
  Bottom 0.254: TP8.P$1 18.04,18.03 22.99,18.03 v23.03,18.07 23.12,18.16 23.44,18.16 24.02,17.58 26.74,17.58 27.18,18.03 27.18,18.08 27.27,18.16 | v27.27,21.51 27.27,18.16 | 27.27,18.16 27.45,17.98 v27.45,17.29
SD_CD
  Top 0.254: U1.24 21.65,20.74 R19.2 30.6,21.62 J2.SW-B
SD_CS  (via drill 0.35)
  Top 0.254: v9.41,22.61 9.5,22.7 10.74,22.7 12.01,23.98 14.58,23.98 14.74,24.14 14.74,24.46 U1.31 15.83,25.55 15.83,25.87 16.22,26.26 16.91,26.26 17.09,26.44 17.33,26.44 19.08,28.19 20,28.19 21.79,29.97 34.3,29.97 v34.55,30.22 | v39.89,29.21 42.04,29.21 J2.2
  Bottom 0.254: TP9.P$1 9.91,22.1 v9.41,22.61 | v39.89,29.21 39.12,29.97 34.8,29.97 v34.55,30.22
SDA  (via drill 0.35)
  Top 0.254: U4.14 38.05,12.59 38.05,12.2 37.38,11.53 35.28,11.53 33.62,13.19 33.62,15.16 33.54,15.24 | U1.21 22.99,16.89 23.07,16.96 v23.12,16.96 | 33.54,15.24 33.54,16.76 31.25,16.76 v30.81,16.32 | 33.54,15.24 33.28,15.49 32.08,15.49 31.04,14.45 30.29,14.45 R18.2 | U2.11 37.85,17.53 36.94,18.44 32.73,18.44 32.07,17.78 v28.97,17.78 | U8.8 27.94,22.04 v28.38,21.59
  Bottom 0.254: 23.12,16.76 20.84,14.48 TP7.P$1 | 23.12,16.76 26.91,16.76 27.17,16.5 28.96,16.5 | 28.96,16.5 30.63,16.5 v30.81,16.32 | v23.12,16.96 23.12,16.76 | v28.38,21.59 28.38,18.37 v28.97,17.78 v28.96,17.77 28.96,16.5
USB_DN  (via drill 0.35)
  Top 0.254: J1.B7 33.62,7.32 33.62,6.7 34.04,6.27 v34.04,6.1 34.55,6.6 J1.A7 | U1.13 19.64,6.96 19.64,6.64 20.18,6.1 v20.33,6.1
  Bottom 0.254: TP5.P$1 14.63,10.16 15.66,9.13 17.36,9.13 17.84,8.65 17.84,8.59 v20.33,6.1 20.97,6.1 21.28,5.79 28.12,5.79 29.88,4.03 32.35,4.03 33.69,5.37 33.69,5.74 v34.04,6.1
USB_DP  (via drill 0.35)
  Top 0.254: J1.A6 34.05,8.39 | U1.14 21.27,6.6 21.54,6.6 v21.57,6.57 | 34.05,8.39 34.24,8.39 34.25,8.37 34.68,8.37 35.05,8.01 J1.B6 | 34.05,8.39 33.74,8.39 v33.51,8.62
  Bottom 0.254: 21.6,6.6 18.04,10.16 TP6.P$1 | 21.6,6.6 22.04,6.6 22.45,6.2 28.28,6.2 30.04,4.44 32.18,4.44 33.28,5.54 33.28,8.39 v33.51,8.62 | 21.6,6.6 v21.57,6.57
USB_MON  (via drill 0.35)
  Top 0.254: U1.20 22.03,16.04 22.64,16.04 22.81,16.2 25.97,16.2 25.99,16.18 25.99,11.12 v25.73,10.85 | R11.2 40.78,9.31 34.47,9.31 33.55,10.22 32.62,10.22 v32.27,10.58 32.27,10.92 31.76,11.43 R17.1
  Bottom 0.254: v25.73,10.85 26,10.58 v32.27,10.58
V_BATT  (via drill 0.35)
  Top 0.254: C5.1 22.66,39.57 22.66,38.82 | U8.3 26.94,25.9 | U8.2 27.44,25.4 26.94,25.9 | C3.1 29.73,25.91 26.94,25.91 26.94,25.9 | R3.1 24.65,25.65 24.9,25.91 | 24.9,25.91 26.93,25.91 | 26.93,25.91 26.94,25.9 | 26.93,25.91 v26.93,25.66 | U6.P$4 10.39,28.41 9.66,27.68 v9.66,27.56 8.27,27.56 v7.12,26.42 | 22.66,38.82 22.66,37.13 C13.1 23.46,31.73 v23.12,31.39 | 24.9,25.91 21.6,25.91 v21.45,25.76 | 22.66,38.82 22.8,38.68 v22.8,38.65 | v3.56,22.35 3.56,12.45 3.82,12.19 v6.87,12.19
  Top 0.508: Q1.2 36.07,41.41 36.07,43.34 35.83,43.58 35.83,43.75 v35.88,43.8 v35.88,43.81 | U5.3 27.22,44.73 v26.86,45.09
  Bottom 0.254: v26.93,25.66 26.68,25.91 24.9,25.91 23.12,27.69 v23.12,31.39 | v9.66,27.56 10.01,27.91 19.3,27.91 v21.45,25.76 | v7.12,26.42 4.83,24.13 4.83,23.37 3.82,22.35 v3.56,22.35 | v6.87,12.19 5.48,12.19 TP14.P$1 | 26.61,45.09 26.61,41.71 25.19,40.29 25.19,39.6 24.08,38.49 22.95,38.49 v22.8,38.65
  Bottom 0.508: J3.2 25.28,45.09 26.56,45.09 26.61,45.09 26.61,45.12 26.83,45.12 v26.86,45.09 30.54,45.09 30.95,45.49 33.88,45.49 35.57,43.81 v35.88,43.81
V_USB  (via drill 0.35)
  Top 0.254: J1.B4_A9 36.7,8.24 36.84,8.38 38.62,8.38 | R11.1 42.22,5.75 C1.1 40.65,7.58 39.85,8.38 38.62,8.38 | J1.A4_B9 31.9,8.24 31.76,8.38 30.74,8.38 | 30.74,8.38 28.2,8.38 27.95,8.13 C2.1 26.76,8.64 26.17,8.64 25.7,9.12 25.7,9.75 26.49,10.54 26.49,12.56 26.42,12.63 26.42,17.27 25.36,18.34 25.36,19.77 25.8,20.21 28.81,20.21 29.06,19.96 30.43,19.96 30.53,20.06 31.09,20.06 v31.5,20.47 | R4.1 24.7,42.1 25.66,42.1 | 25.66,42.1 26.68,42.1 26.72,42.13 U5.4 27.79,42.16 v28.71,42.16 | R15.2 24.81,38.94 25.59,39.72 25.59,42.03 25.66,42.1 | 38.62,8.38 v38.62,8.55 | v30.6,8.59 30.74,8.45 30.74,8.38
  Top 0.381: Q1.1 37.45,40.89 v38.25,40.89 | v39.38,37.08 38.43,38.03 D4.1
  Bottom 0.254: v28.71,42.16 36.58,42.16 | TP17.P$1 7.37,14.48 7.37,13.72 8.39,12.7 14.42,12.7 15.69,11.43 17.78,11.43 22.61,6.6 28.45,6.6 30.21,4.84 32.02,4.84 32.88,5.7 32.88,6.92 32.02,7.78 31.56,7.78 30.74,8.59 | 30.74,8.59 31.6,9.45 37.72,9.45 v38.62,8.55 | v30.6,8.59 30.74,8.59
  Bottom 0.381: v39.38,37.08 39.38,39.76 v38.25,40.89 36.98,42.16 36.58,42.16
  Bottom 0.508: v39.38,37.08 39.38,31.24 41.16,29.46 41.16,22.23 33.25,22.23 v31.5,20.47

## Text on the board
tPlace: ACT | FIX | PWR | X | Z | Y | RESET | BOOT | LOG
bPlace: MOSI | TX0 | RX0 | SD | MISO | SCK | 3V3 | BOOT | GND | SCL | USB | SDA | BATT | XTSD | RST | RX1 | TX1 | LOG | D- | D+
tSilk: 1S
_bsilk: V_USB